# Altium PCB PCB-trb01-V2.30 - 2.PcbDoc (part 2 of 2)
Units mil, origin at the board's own origin, x right, y up, seen from the top; angles counter-clockwise.
Board outline 4312.6 x 590.55 mil, 4 copper layers (Top, GND, POWER, Bottom), stack 35.4 mil thick; 297 components, 117 nets, 641 pads, 0 vias.
Unrouted connection lines stored in the file: 1.
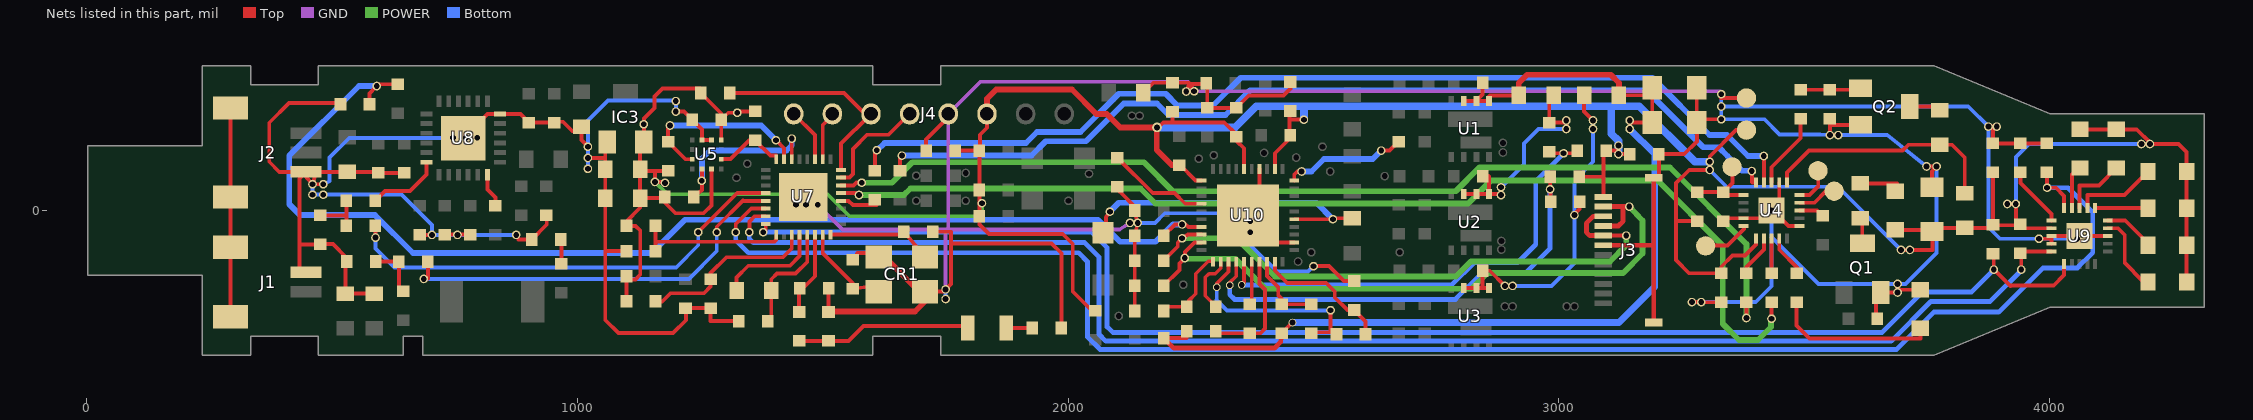
[diagram p4: the nets of this part, all layers, seen from the top]

## Nets (pads, with @x,y where several pads share a name; then routed paths per layer and width w, separated by ;. In a path a pad name is that pad's centre, name@x,y a point inside that pad or via, vN(x,y) a via of type N, cw(c..) or ccw(c..) an arc to the next point about the centre after c; other vN are vias at no path point) (continued)
$$$44: @2_69.1 @2_108.1 C35.2 J3.3 J3.5 U10.28 | length 1228.5
  Top w7.87: C35.2@2194.88,-102.36 2194.88,-102.17 2223.43,-73.62 2223.43,-65.55 2232.28,-56.69 2243.7,-49.21 U10.28@2271.65,-49.21 ; J3.5@3090.55,-51.18 3137.01,-51.18
  Top w9.84: J3.5@3090.55,-51.18 3062.99,-51.18 3055.91,-44.09 3055.91,-25.98 3070.08,-11.81 J3.3@3090.55,-11.81
  POWER w11.81: 2232.28,-56.69 2343.31,-56.69 2421.26,-134.65 2789.76,-134.65 2820.47,-103.94 3103.94,-103.94 3137.01,-70.87 3137.01,-51.18
$$$45: R37.2 U10.32 | length 130.2
  Top w7.09: R37.2@2300.39,-196.06 2304.33,-198.82 2279.53,-174.02 2279.53,-136.22 2287.01,-128.74 2300,-128.74 2311.02,-117.72 U10.32@2311.02,-104.33
$$$46: R8.2 U8.12 | length 69.7
  Top w7.87: U8.12@816.93,72.83 816.93,42.52 833.07,26.38 R8.2@833.07,9.84
$$$47: R36.1 R37.1 U10.31 | length 175.1
  Top w7.09: R37.1@2241.34,-196.06 2245.28,-184.25 2260.24,-169.29 2260.24,-128.74 2285.43,-103.54 2294.49,-103.54 U10.31@2295.28,-104.33
  Top w7.87: R36.1@2194.88,-204.72 2194.88,-196.06 R37.1@2241.34,-196.06
$$$49: @2_38.1 @2_39.1 @2_42.1 @2_43.1 R25.1 R31.1 R57.2 U2.5 U2.6 U2.7 | length 476.2
  Top w7.87: U2.7@2806.1,33.46 U2.6@2831.69,33.46 U2.5@2857.28,33.46 ; R57.2@2844.49,70.08 2844.92,69.08 2845.91,70.08 2856.69,70.08 2857.28,69.49 U2.5@2857.28,33.46 ; 2881.89,31.5 2881.89,32.68 2881.1,33.46 ; 2881.89,47.24 2881.89,46.67 2881.71,46.5 2881.89,46.32 2881.89,33.46 2881.1,33.46 ; R25.1@2988.98,234.65 2980.32,230.71 R31.1@2980.32,179.13 3014.96,179.13 ; 3014.96,166.14 3014.96,179.13 ; 3014.96,183.46 3014.96,179.13 ; U2.5@2857.28,33.46 2850.39,33.46 2881.1,33.46
  Bottom w7.87: 2881.89,47.24 2928.74,94.09 2928.74,136.61 2958.27,166.14 3014.96,166.14
$$$50: Q1.3 R3.1 | length 51.9
  Top w7.87: R3.1@3614.17,-15.75 3617.84,-24.92 3617.84,-65.17 Q1.3@3618.11,-66.93
$$$51: R9.2 R10.1 R70.1 | length 116.1
  Top w7.87: R10.1@589.37,-103.94 635.83,-103.94 R70.1@636.61,-104.72 636.61,-164.17 R9.2@645.67,-164.17
$$$52: @2_40.1 @2_41.1 @2_44.1 @2_45.1 @2_118.1 R26.1 R32.1 R61.2 U3.5 U3.6 U3.7 | length 702.1
  Top w7.87: U3.7@2806.1,-157.87 U3.6@2831.69,-157.87 2844.49,-157.87 ; U3.5@2857.28,-157.87 2844.49,-157.87 ; 2905.51,-153.54 2889.76,-153.54 2859.06,-122.83 R61.2@2844.49,-122.83 2844.49,-157.87 ; 3031.5,-9.45 3031.5,-7.48 3042.13,3.15 R32.1@3042.13,17.72 ; R26.1@3051.18,234.65 3051.18,201.57 3069.29,183.46
  Bottom w7.87: 2905.51,-153.54 2985.04,-153.54 3031.5,-107.09 3031.5,-9.45 3031.5,62.2 3032.28,62.2 3069.29,99.21 3069.29,166.14 3069.29,183.46
$$$53: @2_35.1 @2_36.1 C22.1 D3.1 U10.5 | length 644.2
  Top w7.87: D3.1@2070.87,-45.28 2076.8,-43.28 2076.8,-14.34 2085.04,-2.36 ; U10.5@2460.63,-17.72 2539.37,-17.72 2541.09,-17.34 2541.24,-17.34 2542.84,-15.75 C22.1@2578.74,-15.75
  Bottom w11.81: 2085.04,-2.36 2103.15,15.75 2505.91,15.75 2539.37,-17.72
$$$54: @2_17.1 @2_18.1 R35.1 R38.1 U10.33 | length 431.9
  Top w7.87: 2302.76,-156.3 2302.76,-148.82 2326.77,-124.8 U10.33@2326.77,-104.33 ; R35.1@2495.28,-250 2493.7,-248.43 2493.7,-248.03 2534.65,-248.03 ; 2534.65,-203.15 2534.65,-248.03 ; R38.1@2546.85,-251.97 2542.91,-248.03 2534.65,-248.03
  Bottom w7.87: 2302.76,-156.31 2302.76,-181.88 2302.36,-182.28 2324.02,-203.94 2382.68,-203.94 2533.86,-203.94 2534.65,-203.15
$$$55: R35.2 R67.2 U10.38 | length 159.1
  Top w7.87: U10.38@2405.51,-104.33 2405.51,-133.46 2427.95,-155.91 2427.95,-172.44 2435.04,-179.53 R67.2@2435.04,-190.94 R35.2@2495.28,-190.94
$$$56: C10.1 R38.2 U10.39 | length 278.8
  Top w7.87: U10.39@2421.26,-104.33 2421.26,-122.83 2446.46,-148.03 2525.98,-148.03 2543.31,-165.35 2543.31,-177.17 2568.9,-202.76 C10.1@2582.68,-202.76 2605.91,-225.98 R38.2@2605.91,-251.97
$$$57: R34.1 R73.2 U10.37 | length 250
  Top w7.87: R73.2@2300.39,-245.67 2300.39,-250 R34.1@2370.08,-250 2391.73,-250 2401.18,-240.55 2401.18,-161.02 2389.76,-149.61 U10.37@2389.76,-104.33
$$$58: R34.2 U10.36 | length 88.2
  Top w7.87: R34.2@2370.08,-190.94 2374.02,-187.01 U10.36@2374.02,-104.33
$$$59: R20.2 U4.7 | length 85.5
  Top w7.87: R20.2@3381.89,-127.95 3381.89,-114.96 3417.32,-79.53 U4.7@3417.32,-57.09
$$$60: IR1.2 R3.2 | length 91
  Top w7.87: R3.2@3614.17,55.12 3688.98,55.12 IR1.2@3685.04,39.37
$$$61: R27.2 U4.8 | length 70.9
  Top w7.87: R27.2@3433.07,-127.95 U4.8@3433.07,-57.09
$$$62: @2_133.1 @2_135.1 R21.1 U5.2 U7.22 | length 360.8
  Top w7.87: R21.1@1237.4,27.56 1253.94,42.13 1253.94,61.42 ; 1253.54,60.63 1253.94,61.02 1253.94,61.42 ; U5.2@1253.94,84.65 1253.94,61.42 ; U7.22@1437.01,104.33 1437.01,146.46
  Bottom w11.81: 1253.54,60.63 1254.33,61.42 1254.33,105.91 1270.47,122.05 1426.38,122.05 1437.01,132.68 1437.01,146.46
$$$63: @2_13.1 @2_54.1 R69.2 U7.30 U9.16 | length 3428.7
  Top w7.87: 1322.83,-44.09 1322.83,-27.56 1354.33,3.94 U7.30@1383.86,3.94 ; R69.2@3994.09,77.56 3994.49,77.17 3994.49,46.46 4012.6,46.46 4029.13,29.92 U9.16@4029.13,5.12
  Bottom w9.84: 1322.83,-44.09 1322.83,-60.63 1348.43,-86.22 2021.65,-86.22 2039.37,-103.94 2039.37,-257.48 2064.96,-283.07 3687.8,-283.07 3763.78,-207.09 3896.06,-207.09 3985.83,-117.32 4053.54,-117.32 4053.94,-116.93 4056.3,-116.93 4087.4,-85.83 4087.4,-3.94 4037.01,46.46 3994.49,46.46
$$$64: R39.1 U5.5 U7.24 | length 148.2
  Top w7.87: U5.5@1293.31,104.33 1293.7,104.72 1311.81,104.72 1349.61,142.52 1361.81,142.52 R39.1@1362.2,142.91 1393.31,111.81 1405.12,111.81 U7.24@1405.51,104.33
$$$65: R74.1 U7.12 | length 87.8
  Top w7.87: U7.12@1537.4,19.69 1552.76,19.68 1561.42,11.02 1610.24,11.02 R74.1@1606.3,21.65
$$$66: R19.1 U4.18 | length 154.4
  Top w7.87: U4.18@3433.07,57.09 3433.07,88.19 3492.13,147.24 R19.1@3492.13,187.01
$$$67: R15.1 U9.1 | length 124.3
  Top w7.87: R15.1@3940.16,77.56 3940.16,55.91 4003.54,-7.48 U9.1@4003.54,-20.47
$$$68: @2_32.1 @2_128.1 R28.2 R31.2 U10.35 | length 955.1
  Top w7.87: 2353.54,-151.57 2358.27,-147.24 U10.35@2358.27,-104.33 ; R31.2@2980.32,120.08 2982.68,116.54 3009.45,116.54 3035.83,116.54 R28.2@3037.4,122.05
  Bottom w9.84: 2353.54,-151.57 2781.5,-151.57 2827.17,-105.91 2916.14,-105.91 2952.76,-69.29 2952.76,59.84 3009.45,116.54
$$$69: @2_55.1 @2_102.1 R24.1 U7.31 U9.5 | length 3005.7
  Top w7.87: 1350.39,-44.09 1350.42,-43.29 1351.03,-42.68 1351.03,-22.2 1361.42,-11.81 U7.31@1383.86,-11.81 ; 3941.73,-120.47 3941.73,-86.61 R24.1@3940.16,-87.01 3941.73,-83.46 U9.5@4003.54,-83.46
  Bottom w9.84: 1350.39,-44.09 1350.39,-57.13 1358.62,-65.35 2033.86,-65.35 2062.59,-94.08 2062.59,-251.6 2076.74,-266.14 3676.77,-266.14 3757.87,-185.04 3878.74,-185.04 3942.52,-121.26 3941.73,-120.47
$$$70: @2_56.1 @2_103.1 R23.1 U7.32 U9.6 | length 2983.2
  Top w7.87: 1378.74,-44.09 1382.68,-40.16 1383.86,-40.16 U7.32@1383.86,-27.56 ; R23.1@3884.25,-87.8 3885.83,-86.61 3885.83,-120.47 3886.61,-120.47 3920.08,-153.94 3921.46,-152.56 4007.87,-152.56 4029.13,-131.3 U9.6@4029.13,-109.06
  Bottom w9.84: 1378.74,-44.09 2048.03,-44.09 2079.53,-75.59 2079.53,-237.01 2090.94,-248.43 3658.66,-248.43 3741.34,-165.75 3840.55,-165.75 3885.83,-120.47
$$$71: LED1.2 U9.17 | length 89.4
  Top w7.87: U9.17@4044.88,5.12 4044.88,73.23 4046.46,74.8 LED1.2@4061.42,86.61
$$$72: LED2.2 U9.18 | length 135.5
  Top w7.87: U9.18@4060.63,5.12 4060.63,51.18 4100,51.18 LED2.2@4135.43,86.61
$$$73: LED3.2 U9.19 | length 170.4
  Top w7.87: U9.19@4076.38,5.12 4076.38,31.5 4152.76,31.5 4152.76,32.28 LED3.2@4200,79.53
$$$74: LED4.2 U9.20 | length 108
  Top w7.87: U9.20@4092.13,5.12 4199.61,5.12 LED4.2@4200,4.72
$$$75: LED5.2 U9.15 | length 111
  Top w7.87: U9.15@4117.72,-20.47 4153.54,-20.47 4203.94,-70.87 LED5.2@4200,-70.87
$$$76: LED6.2 U9.14 | length 161.6
  Top w7.87: U9.14@4117.72,-36.22 4138.58,-36.22 4152.76,-50.39 4152.76,-107.09 4188.98,-143.31 4199.21,-143.31 LED6.2@4200,-145.67
$$$77: PT1.2 R6.2 U4.20 | length 489
  Top w7.87: U4.20@3464.57,57.09 3464.57,77.17 3509.45,122.05 3700,122.05 3711.81,133.86 R6.2@3775.59,133.86 3800.79,133.86 3826.77,107.87 PT1.2@3826.77,35.43
$$$78: Q2.3 R6.1 | length 67.3
  Top w7.87: Q2.3@3714.96,211.81 3774.8,211.81 3775.59,211.02 R6.1@3775.59,204.72
$$$79: C39.1 R62.2 U7.1 | length 309
  Top w7.87: C39.1@1159.45,-82.68 1159.45,-63.78 ; R62.2@1159.45,-31.5 1159.45,-63.78 ; U7.1@1405.51,-49.21 1405.51,-59.06 1400.79,-63.78 1159.45,-63.78
$$$80: C12.1 CR1.1 U7.7 | length 210.1
  Top w7.87: U7.7@1500,-49.21 1500,-86.61 1500.06,-86.68 1501.96,-88.58 1501.96,-88.71 1561.02,-147.76 C12.1@1561.02,-159.45 1620.08,-151.57 CR1.1@1614.17,-165.35
$$$81: J4.2 U7.18 | length 101.3
  Top w7.87: U7.18@1500,104.33 1500,174.05 1520.43,194.47 1520.43,196.11 J4.2@1519.68,196.85
$$$82: Q2.1 R7.1 R19.2 | length 124.9
  Top w7.87: R19.2@3492.13,246.06 R7.1@3551.97,246.06 3613.39,246.06 3613.39,248.03 Q2.1@3614.57,249.21
$$$83: J4.1 U7.19 | length 110.5
  Top w7.87: J4.1@1440.94,196.85 1484.25,153.54 U7.19@1484.25,104.33
$$$84: LED8.1 R71.1 | length 330.8
  Top w7.87: R71.1@3484.25,-187.01 3484.25,-234.65 3510.24,-260.63 3736.22,-260.63 LED8.1@3736.22,-240.16
$$$85: R71.2 U4.9 | length 86
  Top w7.87: U4.9@3448.82,-57.09 3448.82,-79.92 3484.84,-115.94 3484.25,-116.54 R71.2@3484.25,-127.95
$$$86: R14.1 U4.13 | length 51.3
  Top w7.87: U4.13@3490.16,0 3525.9,0 3536.37,-10.46 3536.84,-10.46 R14.1@3537.01,-10.63
$$$87: @2_90.1 U4.5 | length 99.3
  Top w7.87: 3298.82,-72.05 3299.61,-71.26 3343.7,-71.26 3377.17,-37.8 3377.17,-32.68 U4.5@3375.98,-31.5
$$$88: @2_112.1 @2_113.1 R70.2 U7.29 | length 833.5
  Top w7.87: 687.4,-139.37 695.67,-138.19 R70.2@695.67,-104.72 ; 1284.25,-44.09 1284.25,-33.07 1337.4,20.08 1337.8,19.68 U7.29@1383.86,19.69
  Bottom w7.87: 687.4,-139.37 1227.56,-139.37 1284.25,-82.68 1284.25,-44.09
$$$89: C3.2 R5.1 | length 49.7
  Top w7.87: C3.2@966.54,-59.06 967.72,-60.24 R5.1@967.72,-108.27
$$$90: @2_81.1 @2_140.1 R27.1 U7.13 | length 2223.5
  Top w7.87: U7.13@1537.4,35.43 1566.98,35.43 1568.92,33.49 1570.22,33.49 1571.88,31.83 1574.02,31.5 ; 3433.07,-220.47 R27.1@3433.07,-187.01
  POWER w11.81: 1574.02,31.5 1665.35,31.5 1678.74,44.88 2147.24,44.88 2177.95,14.17 2814.96,14.17 2862.2,61.42 3200.79,61.42 3333.86,-71.65 3333.86,-230.71 3366.93,-263.78 3405.51,-263.78 3431.89,-237.4 3431.89,-221.65 3433.07,-220.47
$$$91: @2_80.1 @2_137.1 R20.1 U7.14 | length 2155.3
  Top w7.87: U7.14@1537.4,51.18 1562.99,51.18 1568.5,56.69 1579.53,56.69 ; 3381.89,-218.9 R20.1@3381.89,-187.01
  POWER w11.81: 1579.53,56.69 1640.94,56.69 1682.68,98.43 2154.33,98.43 2213.39,39.37 2789.76,39.37 2837.8,87.4 3225.98,87.4 3381.89,-68.5 3381.89,-218.9
$$$92: @2_57.1 @2_58.1 R68.2 U4.16 | length 1938.2
  Top w7.87: R68.2@1657.48,80.71 1657.48,104.87 1660.98,108.38 1661.42,111.81 ; 3392.91,80.32 3392.91,57.87 3393.7,57.09 U4.16@3401.57,57.09
  Bottom w11.81: 1661.42,111.82 1925.2,111.82 1954.33,140.94 2036.22,140.94 2113.39,218.11 2181.1,218.11 2204.72,194.49 2320.47,194.49 2370.87,244.88 3177.95,244.88 3294.09,128.74 3325.59,128.74 3343.12,110.84 3372.87,81.1 3392.91,80.32
$$$93: @2_2.1 @2_8.1 @2_9.1 @2_61.1 @2_70.1 @2_86.1 @2_92.1 @2_93.1 @2_94.1 @2_95.1 @2_100.1 @2_101.1 @2_116.1 @2_117.1 @2_132.1 @2_134.1 @2_143.1 @2_144.1 C14.2 C15.1 C16.1 C17.1 C20.1 C23.2 C24.2 C25.1 C31.2 C37.1 C42.1 IC3.2 IR1.1 J3.1 J4.6 LED1.1 LED2.1 LED3.1 LED4.1 LED5.1 LED6.1 PT1.1 R2.1 R16.1 R17.1 R18.1 R21.2 R22.2 R23.2 R24.2 R28.1 R29.1 R30.1 R39.2 R40.1 R41.1 R42.1 R44.1 R62.1 R66.2 U4.6 U5.3 U5.7 U9.2 U10.12 U10.16 U10.21 | length 7657.6
  Top w7.87: R41.1@1100.39,-185.04 R42.1@1100.39,-133.86 1101.57,-140.55 1118.59,-140.55 1128.39,-130.75 1128.39,-94.49 1128.39,-40.99 1118.9,-31.5 R62.1@1100.39,-31.5 1100.39,-22.05 1127.95,5.51 C16.1@1127.95,25.2 ; 1135.43,175.59 1135.83,175.2 ; 1178.74,56.3 1176.77,58.27 1158.27,58.27 1158.27,80.71 ; R22.2@1185.04,80.71 1158.27,80.71 ; U5.3@1273.62,84.65 1273.23,84.25 1273.23,10.24 1257.48,-5.51 1200,-5.51 1178.35,16.14 R21.2@1178.35,27.56 1176.77,25.2 C16.1@1127.95,25.2 ; U5.7@1293.31,143.7 C17.1@1293.31,185.04 ; R39.2@1362.2,201.97 1328.74,201.97 1325.98,199.21 1307.48,199.21 C17.1@1293.31,185.04 ; C25.1@1769.69,122.05 R18.1@1819.29,122.05 R18.1@1819.28,120.47 ; 1824.41,14.96 1819.29,14.96 ; J4.6@1834.65,196.85 1834.65,168.5 1820.47,154.33 1820.47,120.47 R18.1@1819.28,120.47 ; R30.1@2055.12,-204.33 2054.72,-203.94 2048.03,-203.94 2009.45,-165.35 2009.45,-68.5 1988.98,-48.03 1838.98,-48.03 1819.29,-28.35 R16.1@1819.29,-11.81 1819.29,14.96 ; 2181.1,169.29 2194.49,179.53 2212.6,179.53 ; C24.2@2212.6,201.18 2212.6,179.53 ; R40.1@2226.38,92.52 2228.35,92.52 2259.84,61.02 U10.21@2271.65,61.02 ; C31.2@2342.52,150 2342.73,150.21 C31.2@2342.86,150.21 ; U10.16@2358.27,84.65 2358.27,126.73 2345.34,139.66 2345.34,147.73 C31.2@2342.86,150.21 ; U10.12@2421.26,84.65 2421.26,116.54 2451.97,147.24 2451.97,153.15 R44.1@2450.79,154.33 ; R44.1@2452.76,153.54 R44.1@2450.79,154.33 ; C23.2@2452.76,202.76 2450.79,202.76 2450.79,185.04 ; 2480.32,185.04 2450.79,185.04 ; R29.1@3041.34,68.9 3090.55,68.9 ; J3.1@3090.55,27.56 3090.55,68.9 ; 3121.26,132.28 3121.26,114.96 ; C37.1@3144.49,114.96 3121.26,114.96 ; R2.1@3281.5,-21.65 3238.58,-21.65 ; 3307.09,82.68 3265.52,82.62 3238.58,55.69 3238.58,-21.65 ; 3307.09,99.21 3307.09,110.03 3360.84,163.78 3381.89,163.78 ; U4.6@3401.57,-57.09 3401.57,-69.29 3379.33,-91.54 3353.74,-91.54 3330.71,-114.57 C15.1@3330.71,-127.95 3265.35,-127.95 3238.58,-101.18 3238.58,-21.65 ; IR1.1@3685.04,-39.37 C42.1@3759.84,-39.37 ; 3696.85,-80.32 3714.96,-80.32 3760.63,-80.32 3760.63,-43.7 C42.1@3759.84,-42.91 C42.1@3759.84,-39.37 ; C14.2@3883.86,77.56 R23.2@3883.86,-27.56 ; 3913.39,13.39 3930.71,13.39 R24.2@3930.71,-29.92 ; U9.2@4003.54,-36.22 3941.73,-36.22 3941.73,-31.5 R24.2@3940.16,-27.95 R24.2@3930.71,-29.92 ; LED1.1@4061.42,165.35 LED2.1@4135.43,165.35 4177.17,165.35 4203.94,138.58 4203.94,135.43 ; 4186.61,135.43 4203.94,135.43 ; LED6.1@4278.74,-145.67 LED5.1@4278.74,-70.87 LED4.1@4278.74,4.72 LED3.1@4278.74,79.53 4278.74,118.9 4262.2,135.43 4203.94,135.43 ; C16.1@1127.95,25.2 C20.1@1127.95,80.71 ; C20.1@1127.95,80.71 1158.27,80.71 ; C20.1@1127.95,80.71 C20.1@1127.95,84.25 1127.95,143.31 1132.28,143.31 IC3.2@1135.83,139.76 1135.83,175.2 ; 1135.83,175.2 1135.83,187.4 1157.09,208.66 1157.09,232.28 1173.62,248.82 1251.57,248.82 R66.2@1251.57,239.37 1292.91,198.03 1292.91,185.43 C17.1@1293.31,185.04 ; 1819.29,14.96 1819.29,41.49 1820.44,42.63 R17.1@1819.29,41.73 R18.1@1819.29,120.46 ; 2212.6,179.53 2318.11,179.53 2342.86,154.78 C31.2@2342.86,150.21 ; R44.1@2450.79,154.33 2450.79,185.04 ; 3090.55,68.9 3090.55,109.06 R28.1@3096.46,122.05 3114.17,122.05 3121.26,114.96 ; C42.1@3759.84,-39.37 3759.84,-36.22 3759.06,-35.43 PT1.1@3826.77,-35.43 3883.86,-35.43 R23.2@3883.86,-27.56 ; R23.2@3883.86,-27.56 3883.86,-28.35 R23.2@3884.25,-28.74 3885.04,-29.92 R24.2@3930.71,-29.92
  Top w11.81: J4.6@1834.65,196.85 1834.65,227.56 1853.73,246.64 2007.69,246.64 2057.48,196.85 2078.74,196.85 2106.3,169.29 2181.1,169.29 2180.5,166.26 2180.5,123.05 2211.02,92.52 R40.1@2226.38,92.52
  POWER w7.87: 1158.27,58.27 1183.46,33.07 1509.45,33.07 1554.33,-11.81 1813.39,-11.81 1824.41,-0.79 1824.41,14.96
  Bottom w7.87: 3307.09,99.21 3307.09,82.68 3341.34,48.43 3568.11,48.43 3696.85,-80.32 ; 3930.71,13.39 3930.71,108.66 3956.69,134.65 3956.69,135.43 4186.61,135.43
  Bottom w15.75: 2181.1,169.29 2340.16,169.29 2383.46,212.6 2479.53,212.6 ; 2480.32,185.04 2480.32,211.81 2479.53,212.6 ; 3121.26,114.96 3121.26,141.73 3106.3,156.69 3106.3,212.6 ; 3307.09,99.21 3277.17,99.21 3163.78,212.6 3106.3,212.6 ; 2479.53,212.6 3106.3,212.6
$$$94: @2_129.1 U4.14 | length 80.3
  Top w7.87: U4.14@3490.16,15.75 3520.47,15.75 3544.09,39.37 3560.63,39.37
$$$95: @2_130.1 U4.15 | length 77.5
  Top w7.87: U4.15@3490.16,31.5 3510.24,31.5 3528.35,49.61 3528.35,80.32 3527.56,81.1
$$$96: @2_4.1 @2_5.1 @2_6.1 @2_7.1 @2_16.1 @2_31.1 @2_63.1 @2_64.1 @2_65.1 @2_66.1 @2_67.1 @2_71.1 @2_72.1 @2_73.1 @2_74.1 @2_75.1 @2_76.1 @2_77.1 @2_78.1 @2_79.1 @2_82.1 @2_83.1 @2_84.1 @2_85.1 @2_87.1 @2_88.1 @2_91.1 @2_96.1 @2_97.1 @2_98.1 @2_99.1 @2_106.1 @2_107.1 @2_122.1 @2_123.1 @2_124.1 @2_125.1 @2_126.1 @2_131.1 @2_136.1 @2_141.1 @2_142.1 @2_145.1 @2_146.1 C1.1 C3.1 C4.2 C5.2 C6.2 C7.2 C8.1 C9.1 C10.2 C11.2 C12.2 C13.2 C14.1 C15.2 C16.2 C17.2 C18.1 C20.2 C23.1 C24.1 C25.2 C26.2 C28.2 C29.2 C30.2 C31.1 C32.1 C33.1 C34.1 C35.1 C36.1 C37.2 C38.2 C39.2 C40.1 C41.1 C42.2 C45.2 CR1.2 CR1.4 IC3.1 J1.2 J2.1 J3.6 J3.13 J3.14 J4.5 K1.1 LED8.2 Q1.2 Q2.2 R4.1 R7.2 R10.2 R11.1 R12.1 R13.1 R15.2 R36.2 R48.2 R63.2 R64.1 R69.1 RS1.2 RS2.2 U4.4 U4.11 U4.19 U4.21 U5.8 U5.9 U7.33 U8.18 U8.25 U9.3 U9.4 U9.13 U9.21 U10.2 U10.14 U10.41 | length 13340.5
  Top w7.87: J1.2@447.24,-125.98 433.86,-125.98 433.86,-68.9 ; 482.68,53.54 460.63,53.54 ; R48.2@517.72,216.54 515.35,218.9 412.6,218.9 372.44,178.74 372.44,99.21 392.91,78.74 J2.1@447.24,78.74 446.46,79.53 444.09,79.53 J2.1@444.09,72.44 ; C5.2@586.61,-169.29 C4.2@527.56,-169.29 527.56,-106.69 R10.2@530.31,-103.94 530.32,-96.46 502.26,-68.4 474.22,-68.4 R64.1@476.38,-68.9 433.86,-68.9 ; R63.2@594.49,76.77 R63.2@596.06,76.77 ; C40.1@647.64,76.77 R63.2@596.06,76.77 ; R11.1@679.53,-49.21 679.92,-49.61 703.94,-49.61 ; R12.1@729.92,-49.21 753.94,-49.21 755.91,-49.61 757.87,-49.21 R13.1@781.89,-49.21 ; U8.25@746.85,148.03 773.23,148.03 773.43,147.83 U8.25@795.08,147.83 ; U8.25@767.72,147.64 794.88,147.64 U8.25@795.08,147.83 ; 875.59,-49.61 880.32,-57.48 880.32,-59.06 C3.1@907.48,-59.06 937.8,-28.74 937.8,-10.63 C1.1@937.01,-9.84 ; 1021.65,107.09 1057.09,107.09 C20.2@1057.09,84.25 ; 1021.65,129.92 1021.65,130.71 1008.66,143.7 C18.1@1008.66,170.87 990.08,161.42 970.77,180.73 965.51,180.73 C9.1@952.76,179.13 C8.1@901.57,179.13 901.57,179.53 884.25,196.85 U8.18@842.52,196.85 817.32,196.85 803.94,183.46 803.94,155.12 803.15,155.12 796.06,148.03 795.28,148.03 U8.25@795.08,147.83 ; IC3.1@1061.02,139.76 1057.09,135.83 C20.2@1057.09,84.25 ; C39.2@1100.39,-82.68 1057.09,-82.68 ; 1200.79,201.57 1217.72,201.57 C17.2@1234.25,185.04 1254.33,164.96 1254.33,144.09 U5.9@1253.94,143.7 U5.8@1273.62,143.7 ; C26.2@1328.74,-225.2 1271.65,-225.2 C13.2@1271.65,-198.82 C30.2@1220.47,-198.82 1221.26,-199.61 1221.26,-223.62 1195.28,-249.61 1083.86,-249.61 1057.09,-222.83 1057.09,-82.68 ; U7.33@1460.63,27.56 1470.08,31.5 U7.33@1489.76,11.81 ; C29.2@1511.81,-206.69 1511.81,-158.66 C28.2@1512.2,-158.27 ; C12.2@1561.02,-100.39 1570.87,-86.61 1611.02,-86.61 1614.96,-86.61 CR1.4@1614.17,-94.49 1625.98,-94.49 CR1.4@1626.77,-95.28 ; CR1.2@1696.85,-156.69 1697.24,-157.09 1701.18,-157.09 1708.66,-164.57 CR1.2@1708.66,-165.35 1749.61,-165.35 1749.61,-161.42 1750.39,-160.63 1761.42,-149.61 1761.42,-66.93 ; C25.2@1710.63,122.05 1710.63,144.88 1754.33,188.58 1754.33,195.28 J4.5@1755.91,196.85 ; C11.2@1724.41,-43.31 1761.02,-43.31 1761.42,-43.7 1761.42,-66.93 ; C45.2@1986.22,-239.37 1986.22,-87.01 1966.14,-66.93 1761.42,-66.93 ; K1.1@2100,48.03 2106.3,37.4 2135.43,8.27 2135.43,0.39 C34.1@2135.83,0 2135.97,-0.03 2136.09,-0.03 2136.26,-0.2 2136.97,-0.2 2139.76,-0.68 2135.83,-4.62 2141.73,-25.2 ; 2125.98,-25.2 2141.73,-25.2 ; R36.2@2135.83,-204.72 C36.1@2135.83,-153.54 C35.1@2135.83,-102.36 C38.2@2135.83,-51.18 2141.73,-25.2 ; C7.2@2153.54,240.16 2173.62,260.24 C24.1@2212.6,260.24 2246.06,260.24 2256.69,242.91 2247.24,257.48 ; 2240.55,242.52 2247.24,257.48 ; C33.1@2281.5,259.06 C33.1@2283.27,257.28 ; U10.41@2366.14,-9.84 2371.65,-15.35 U10.41@2371.65,-21.26 ; U10.14@2389.76,84.65 2389.76,-21.26 U10.41@2371.65,-21.26 ; C23.1@2452.76,261.81 2452.76,248.82 2438.58,234.65 2368.11,234.65 C31.1@2342.52,209.06 C32.1@2283.46,209.06 2283.46,257.09 C33.1@2283.27,257.28 ; U10.2@2460.63,-64.96 2347.24,-64.96 2356.69,-55.51 2370.87,-44.09 2370.87,-22.05 U10.41@2371.65,-21.26 ; 2500,-113.39 2531.5,-113.39 2561.81,-143.7 C10.2@2582.68,-143.7 ; J3.14@3192.91,66.93 3193.7,67.72 3203.54,67.72 C37.2@3203.54,114.96 3255.12,114.96 3281.1,140.94 3281.1,178.74 RS1.2@3280.71,179.13 RS1.2@3280.71,185.83 ; 3270.87,-186.61 3289.76,-186.61 3290.16,-187.01 C15.2@3330.71,-187.01 ; RS2.2@3280.71,250 RS1.2@3280.71,185.83 ; 3330.71,185.83 RS1.2@3280.71,185.83 ; 3330.71,237.01 3329.92,236.22 3329.92,229.13 3381.89,229.13 ; C41.1@3334.65,-21.65 3333.98,-15.75 U4.4@3375.98,-15.75 3433.07,-15.75 U4.21@3433.07,0 U4.21@3436.22,0 ; U4.19@3448.82,57.09 3448.82,0 U4.21@3436.22,0 ; U4.11@3490.16,-31.5 3467.72,-31.5 U4.21@3436.22,0 ; R7.2@3551.97,187.01 3551.97,174.41 ; 3568.9,153.54 3551.97,153.54 3551.97,174.41 ; Q2.2@3614.57,174.41 3551.97,174.41 ; R4.1@3648.82,-220.47 3646.07,-206.29 3646.07,-163.87 Q1.2@3655.51,-167.32 3655.91,-166.93 3689.76,-166.93 3689.76,-161.42 ; 3689.76,-149.61 3689.76,-161.42 ; LED8.2@3736.22,-161.42 3689.76,-161.42 ; 3748.82,89.76 3769.29,89.76 3768.37,88.77 3766.65,87.03 3766.65,86.9 3759.84,80.09 C42.2@3759.84,47.64 ; 3874.8,170.87 3891.73,170.87 3883.86,170.87 C14.1@3883.86,136.61 R15.2@3940.16,136.61 R69.1@3994.09,136.61 ; 3977.95,-57.48 4003.54,-57.48 ; U9.4@4003.54,-67.72 4003.54,-57.48 ; U9.13@4117.72,-51.97 U9.21@4060.63,-51.97 U9.3@4003.54,-51.97 4003.54,-57.48 ; 433.86,-68.9 433.86,65.35 442.52,74.02 J2.1@444.09,72.44 ; J2.1@444.09,72.44 460.63,53.54 ; 460.63,53.54 467.99,79.34 468.59,78.74 C6.2@531.5,78.74 594.63,78.74 594.81,78.93 596.06,77.68 R63.2@596.06,76.77 ; 1057.09,-82.68 C16.2@1057.09,25.2 C20.2@1057.09,84.25 ; 2247.24,257.48 2283.07,257.48 C33.1@2283.27,257.28
  Top w9.84: J3.6@3090.55,-70.87 3192.91,-70.87 ; J3.13@3192.91,-228.35 3192.91,-70.87 ; J3.14@3192.91,66.93 3192.91,-70.87
  Top w11.81: C29.2@1511.81,-206.69 1512.99,-205.51 1688.19,-205.51 1709.45,-184.25 1709.45,-157.48 CR1.2@1708.66,-165.35 ; CR1.4@1626.77,-95.28 1688.19,-156.69 CR1.2@1696.85,-156.69
  GND w7.87: 1489.76,11.81 1540.16,-38.58 1750.39,-38.58 ; 1750.39,-160.63 1750.39,-38.58 ; 2125.98,-25.2 2104.72,-38.58 1755.91,-38.58 ; 3330.71,237.01 3330.71,241.34 3329.13,242.91 2256.69,242.91 2244.09,262.2 1821.26,262.2 J4.5@1755.91,196.85 1755.91,-38.58 ; 1750.39,-38.58 1755.91,-38.58
  Bottom w7.87: 460.63,53.54 460.63,32.28 482.68,32.28 642.15,32.28 703.94,-29.5 703.94,-49.61 755.91,-49.61 875.59,-49.61 ; 482.68,53.54 495.28,59.84 495.28,107.87 535.43,148.03 773.23,148.03 ; 1021.65,85.04 1021.65,107.09 1021.65,129.92 1021.65,183.46 1062.6,224.41 1199.21,224.41 1200.79,222.83 1200.79,201.57 ; 1445.67,11.81 1466.14,11.81 1489.76,11.81 ; 1750.39,-180.32 1750.39,-160.63 ; 2141.73,-25.2 2177.17,-25.2 2196.85,-5.51 2352.56,-5.51 2368.01,-20.96 2368.2,-20.96 2370.87,-23.62 2370.87,-22.05 ; 2370.87,-44.09 2370.87,-70.08 2425.2,-124.41 2488.98,-124.41 2500,-113.39 ; 3289.76,-186.61 3400.79,-186.61 3433.07,-154.33 3433.07,0 3433.07,-54.33 3528.35,-149.61 3689.76,-149.61 3706.3,-149.61 3769.29,-86.61 3769.29,89.76 ; 3330.71,237.01 3330.71,211.81 ; 3551.97,153.54 3668.5,153.54 3748.82,89.76 ; 3568.9,153.54 3532.28,155.12 3449.61,155.12 3418.9,185.83 3330.71,185.83 3330.71,211.81 ; 4055.91,-57.48 3977.95,-57.48 3898.43,-57.48 3874.61,-33.66 3874.8,-33.46 3874.8,170.87 3833.86,211.81 3330.71,211.81
$$$97: @2_110.1 @2_111.1 R47.1 U7.28 | length 935
  Top w7.87: R47.1@588.58,-31.5 588.58,-54.72 588.98,-55.12 ; 1246.46,-44.09 1325.98,35.43 U7.28@1383.86,35.43
  Bottom w7.87: 588.98,-55.12 588.98,-77.17 627.56,-115.75 1201.57,-115.75 1246.46,-70.87 1246.46,-44.09
$$$98: C13.1 R41.2 U7.3 | length 366.3
  Top w7.87: R41.2@1159.45,-185.04 1173.23,-185.04 1189.76,-168.5 1258.27,-168.5 1271.65,-155.12 C13.1@1271.65,-139.76 1271.65,-127.56 1303.94,-95.28 1418.9,-95.28 1437.01,-77.17 U7.3@1437.01,-49.21
$$$99: L1.1 U7.4 | length 216.6
  Top w7.87: L1.1@1324.41,-162.99 1324.41,-136.47 1348.28,-112.6 1433.07,-112.6 1452.76,-92.91 U7.4@1452.76,-49.21
$$$100: C26.1 L1.2 U7.5 | length 231.6
  Top w7.87: C26.1@1387.8,-225.2 1395.28,-217.72 L1.2@1395.28,-162.99 1395.28,-140.16 1407.09,-128.35 1444.88,-128.35 1468.5,-104.72 U7.5@1468.5,-49.21
$$$101: C27.2 C29.1 TN1.1 | length 358.2
  Top w7.87: C27.2@1451.97,-265.75 C29.1@1511.81,-265.75 1552.76,-265.75 1583.07,-235.43 1793.13,-235.43 TN1.1@1795.28,-239.37
$$$102: C27.1 C28.1 U7.6 | length 174.8
  Top w7.87: C27.1@1451.97,-206.69 1451.97,-159.45 C28.1@1453.15,-158.27 1454.72,-156.69 1461.42,-156.69 1484.25,-133.86 U7.6@1484.25,-49.21
$$$103: @2_89.1 C41.2 R2.2 U4.1 | length 159.9
  Top w7.87: R2.2@3281.5,37.4 C41.2@3334.65,37.4 ; 3352.76,88.98 3353.54,88.19 3353.54,56.3 C41.2@3334.65,37.4 ; U4.1@3375.98,31.5 3335.08,31.5 3335.08,36.97 C41.2@3334.65,37.4
$$$104: C11.1 CR1.3 U7.8 | length 226.7
  Top w7.87: U7.8@1515.75,-49.21 1665.35,-49.21 1665.35,-42.71 1664.28,-41.64 C11.1@1665.35,-43.31 CR1.3@1708.66,-94.49
$$$105: J1.3 J1.4 J2.4 J2.5 | length 425.2
  Top w7.87: J1.4@293.7,-216.54 J1.3@293.7,-74.8 J2.5@293.7,27.56 J2.4@293.7,208.66
$$$106: @2_19.1 @2_114.1 @2_115.1 R25.2 R26.2 R33.1 R52.1 R67.1 R73.1 RS1.1 RS2.1 U1.5 U1.6 U1.7 | length 2136
  Top w7.87: R33.1@2194.88,-259.84 2241.34,-259.84 R73.1@2241.34,-245.67 ; R67.1@2435.04,-250 2456.69,-228.35 2457.09,-228.35 ; U1.7@2806.1,223.23 U1.6@2831.69,223.23 ; R52.1@2844.49,259.84 2844.49,236.02 U1.6@2831.69,223.23 ; R25.2@2918.11,234.65 2859.06,234.65 2857.28,232.87 U1.5@2857.28,223.23 U1.6@2831.69,223.23 ; R26.2@3122.05,234.65 3198.82,235.43 RS2.1@3190.16,250 RS1.1@3190.16,179.13 3148.4,179.13 3144.09,174.83 3144.09,173.25 ; 3144.09,166.14 3144.09,173.25 ; 3144.09,183.46 3144.09,173.25
  Top w9.84: R33.1@2194.88,-259.84 2215.35,-280.32 2420.47,-280.32 2433.07,-267.72 R67.1@2435.04,-250
  Top w11.81: R25.2@2918.11,234.65 2918.11,259.84 2934.65,276.38 3105.51,276.38 3122.05,259.84 R26.2@3122.05,234.65
  Bottom w13.78: 2457.09,-228.35 3122.07,-228.35 3195.28,-155.14 3195.28,114.96 3144.09,166.14
$$$107: @2_68.1 @2_109.1 C36.2 J3.2 J3.4 U10.29 | length 1350.8
  Top w7.87: C36.2@2194.88,-153.54 2194.88,-152.76 2226.77,-120.87 2226.77,-107.87 2237.8,-96.85 2237.8,-84.25 2257.09,-64.96 U10.29@2271.65,-64.96
  Top w9.84: J3.4@3090.55,-31.5 3121.26,-31.5 3130.71,-22.05 3130.71,7.87 ; J3.2@3090.55,7.87 3130.71,7.87 ; 3143.31,7.87 3130.71,7.87
  POWER w11.81: 2237.8,-96.85 2237.8,-98.43 2340.55,-98.43 2401.57,-159.45 2822.05,-159.45 2854.33,-127.17 3130.71,-127.17 3170.08,-87.8 3170.08,-20.47 3143.31,7.87
$$$108: R47.2 R64.2 R65.1 | length 104.3
  Top w7.87: R64.2@476.38,-9.84 529.53,-9.84 ; R47.2@529.53,-31.5 529.53,-9.84 ; R65.1@529.53,19.68 529.53,-9.84
$$$109: @2_33.1 @2_121.1 R50.2 U10.10 | length 252.4
  Top w7.87: U10.10@2460.63,61.02 2460.63,73.23 2466.93,79.53 2475.59,79.53 ; 2637.8,122.05 2655.12,122.05 2672.83,139.76 R50.2@2673.23,139.76
  Bottom w11.81: 2475.59,79.53 2496.06,79.53 2521.26,104.72 2620.47,104.72 2637.8,122.05
$$$110: R65.2 U8.6 | length 151.7
  Top w7.87: R65.2@588.58,19.68 608.27,39.37 659.06,39.37 692.91,73.23 U8.6@692.91,98.43
$$$111: J4.3 R66.1 U7.16 | length 445
  Top w7.87: R66.1@1310.63,239.37 1543.31,239.37 1585.04,197.64 1597.64,197.64 J4.3@1598.43,196.85 1594.09,192.91 1537.4,136.22 U7.16@1537.4,82.68
$$$112: J4.4 U7.15 | length 223.6
  Top w7.87: U7.15@1537.4,66.93 1554.33,66.93 1561.42,74.02 1561.42,125.2 1590.55,154.33 1633.86,154.33 1676.38,196.85 J4.4@1677.17,196.85
$$$113: @2_104.1 @2_105.1 R22.1 U5.12 U7.23 | length 375
  Top w7.87: 1188.98,173.23 1185.04,169.29 R22.1@1185.04,139.76 1189.76,138.98 1189.76,135.04 1220.47,104.33 U5.12@1234.25,104.33 ; 1404.72,143.31 1421.26,126.77 U7.23@1421.26,104.33
  Bottom w11.81: 1188.98,173.23 1374.8,173.23 1404.72,143.31
$$$115: @2_1.1 @2_3.1 C38.1 R48.1 R49.1 U10.27 | length 2432.3
  Top w7.87: R48.1@576.77,216.54 576.77,238.02 577.19,238.44 590.16,252.29 591.34,253.46 591.34,253.54 594.88,257.09 R49.1@633.86,257.09 ; C38.1@2194.88,-51.18 2217.72,-28.35 2232.28,-28.35 2239.76,-28.35 2244.88,-33.46 U10.27@2271.65,-33.46
  Bottom w11.81: 591.34,253.54 555.12,253.54 413.39,111.81 413.39,12.6 435.43,-9.45 588.19,-9.45 665.35,-86.61 1151.97,-86.61 1219.68,-18.9 2060.63,-18.9 2105.51,-63.78 2177.95,-63.78 2213.39,-28.35 2232.28,-28.35
$$$116: @2_59.1 @2_60.1 R74.2 U4.17 | length 2051.2
  Top w7.87: R74.2@1606.3,80.71 1606.3,117.13 1610.09,120.92 1610.09,121.22 1610.24,122.83 ; U4.17@3417.32,57.09 3417.32,111.02
  Bottom w11.81: 1610.24,122.83 1626.02,137.4 1914.17,137.4 1936.61,159.84 2025.2,159.84 2103.15,237.8 2198.82,237.8 2222.44,214.17 2295.28,214.17 2351.57,270.47 3190.16,270.47 3306.69,153.94 3342.13,153.94 3385.04,111.02 3417.32,111.02
$$$118: C45.1 TN1.2 | length 53.2
  Top w7.87: TN1.2@1874.02,-239.37 1874.07,-239.32 1875.64,-239.32 1875.69,-239.37 C45.1@1927.17,-239.37
$$$119: @2_62.1 @2_127.1 R29.2 R32.2 U10.34 | length 944.7
  Top w7.87: 2329.13,-152.36 2329.13,-147.24 2342.52,-133.86 U10.34@2342.52,-104.33 ; R29.2@2982.28,68.9 2982.28,44.45 2982.11,44.27 2982.11,43.52 2981.89,43.31 2981.91,42.5 2981.91,41.72 2983.07,40.57 R32.2@2983.07,17.72
  Bottom w9.84: 2329.13,-152.36 2329.13,-171.26 2338.98,-181.1 2788.98,-181.1 2843.7,-126.38 2932.68,-126.38 2981.89,-77.17 2981.89,43.31
$$$120: K1.2 U10.24 | length 210.3
  Top w7.87: K1.2@2100,107.09 2100.79,107.09 2172.44,35.43 2216.93,35.43 2238.58,13.78 U10.24@2271.65,13.78
pads on no net: U4.2 U4.3 U4.10 U4.12 U5.1 U5.4 U5.6 U5.10 U5.11 U7.9 U7.10 U7.17 U7.20 U7.21 U7.25 U8.1 U8.2 U8.3 U8.5 U8.9 U8.10 U8.23 U8.24 U9.7 U9.8 U9.9 U9.10 U9.11 U9.12 U10.18 U10.25

## Polygon pours and split planes (outlines as drawn)
$$$96 on Bottom (solid, remove dead copper, pour order 0): 633.07,276.77 444.09,87.8 444.09,-73.62 1687.8,-73.62 1731.89,-29.53 2015.75,-29.53 2061.02,-74.8 2061.02,-236.61 2100.39,-275.98 3685.43,-275.98 3823.62,-137.8 4079.92,-137.8 4116.93,-100.79 4116.93,89.37 4038.58,167.72 3912.99,167.72 3839.37,241.34 3406.3,241.34 3363.78,283.86 1795.67,283.86 1752.36,240.55 1588.98,240.55 1552.76,276.77
$$$93 on POWER (solid, remove dead copper, pour order 1): 1116.93,277.17 1116.93,-28.35 4238.19,-28.35 4238.19,167.72 4009.84,167.72 3775.59,264.57 1771.26,264.57 1747.64,240.94 1579.92,240.94 1543.7,277.17
$$$96 on GND (solid, remove dead copper, pour order 2): 1035.65,276.38 997.24,235.18 997.24,-61.42 2032.68,-61.42 2042.52,-71.26 2042.52,-190.94 2125.59,-274.02 3749.61,-274.02 3999.21,-167.32 4266.14,-167.32 4266.14,150.39 3998.82,150.39 3748.03,260.24 3712.73,274.8 1820.03,274.8 1790.55,244.09 1566.93,244.09 1536.26,276.38

## Keep-outs
Keep-Out Layer:
  the board outline again, w12

## Other copper
Top:
  drawing of 160 lines, arcs and shapes, not listed
Bottom:
  region: 2898.82,-78.35 2888.58,-88.58 2853.54,-88.58 2824.41,-59.45 2824.41,103.15 2869.68,148.43 2887.4,148.43 2894.49,141.34 2894.49,111.81 2846.06,63.39 2846.06,-6.69 2898.82,-59.45 2898.82,-78.35
  region: 2877.17,-179.53 3035.43,-179.53 3044.49,-188.58 3044.49,-200.39 3039.37,-205.51 2882.28,-205.51 2877.17,-200.39 2877.17,-179.53
  region: 3298.82,107.09 3298.82,76.38 3336.22,38.98 3556.69,38.98 3686.22,-90.55 3718.5,-90.55 3726.77,-82.28 3726.77,-68.9 3600.79,57.09 3345.28,57.09 3317.72,84.65 3317.72,101.18 3311.81,107.09 3298.82,107.09
  region: 2871.65,17.72 2871.65,51.57 2918.9,98.82 2918.9,142.13 2968.9,192.13 3019.29,192.13 3026.38,185.04 3026.38,162.2 3020.08,155.91 2977.17,155.91 2940.16,118.9 2940.16,87.8 2900.39,48.03 2900.39,25.59 2892.52,17.72 2871.65,17.72
  region: 3135.04,193.31 3135.04,161.02 3145.67,150.39 3158.66,150.39 3158.66,186.22 3151.57,193.31 3135.04,193.31
  region: 2877.56,-164.57 2999.21,-164.57 3049.61,-114.17 3049.61,53.54 3080.71,84.65 3080.71,186.22 3074.8,192.13 3062.2,192.13 3056.3,186.22 3056.3,98.82 3017.32,59.84 3017.32,-99.21 2973.23,-143.31 2882.68,-143.31 2877.56,-148.43 2877.56,-164.57
  region: 2157.87,201.18 2124.02,201.18 2119.29,196.46 2119.29,188.58 2123.62,184.25 2153.94,184.25 2157.87,188.19 2157.87,201.18
  region: 3909.45,-0.79 3902.36,6.3 3902.36,118.11 3944.09,159.84 4203.15,159.84 4217.32,145.67 4217.32,128.35 4202.36,113.39 3968.5,113.39 3948.03,92.91 3948.03,6.3 3940.94,-0.79 3909.45,-0.79

## Silkscreen, mask and mechanical layers (free items; w line width, h text height)
Silkscreen Top:
  lines w5.91: 1751.97,-284.25 1751.97,-78.74 2015.75,-78.74 2015.75,-284.25 1751.97,-284.25
  text "DIO" at 1502.36,251.18 h19.68
  text "TCK" at 1414.96,249.61 h19.68
  text "GND" at 1755.91,250.39 h19.68
  text "3.3V" at 1822.83,249.61 h19.68
  text "DIO" at 1908.66,249.61 h19.68
  text "CLK" at 1974.02,248.82 h19.68
  text "B+" at 435.43,182.68 h23.62
  text "PRX" at 1543.31,122.83 h19.68
  text "PTX" at 1627.56,120.47 h19.68
  text "U" at 2913.39,106.3 h23.62
  text "V" at 2912.6,-3.94 h23.62
  text "GND" at 340.94,-9.45 h23.62
  text "GND" at 341.73,-55.91 h23.62
  text "+5V" at 437.01,-225.98 h23.62
  text "W" at 2928.35,-246.46 h23.62
Silkscreen Bottom:
  drawing of 23 lines, arcs and shapes, not listed